# Altium PCB верхняя плата версия 2.PcbDoc (part 2 of 2)
Units mm, origin at the board's own origin, x right, y up, seen from the top; angles counter-clockwise.
Board outline 45 x 53 mm, 4 copper layers (Top Layer 1, Top Layer, Bottom Layer, Bottom Layer 1), stack 0.603 mm thick; 105 components, 130 nets, 774 pads, 328 vias.
Unrouted connection lines stored in the file: 15.
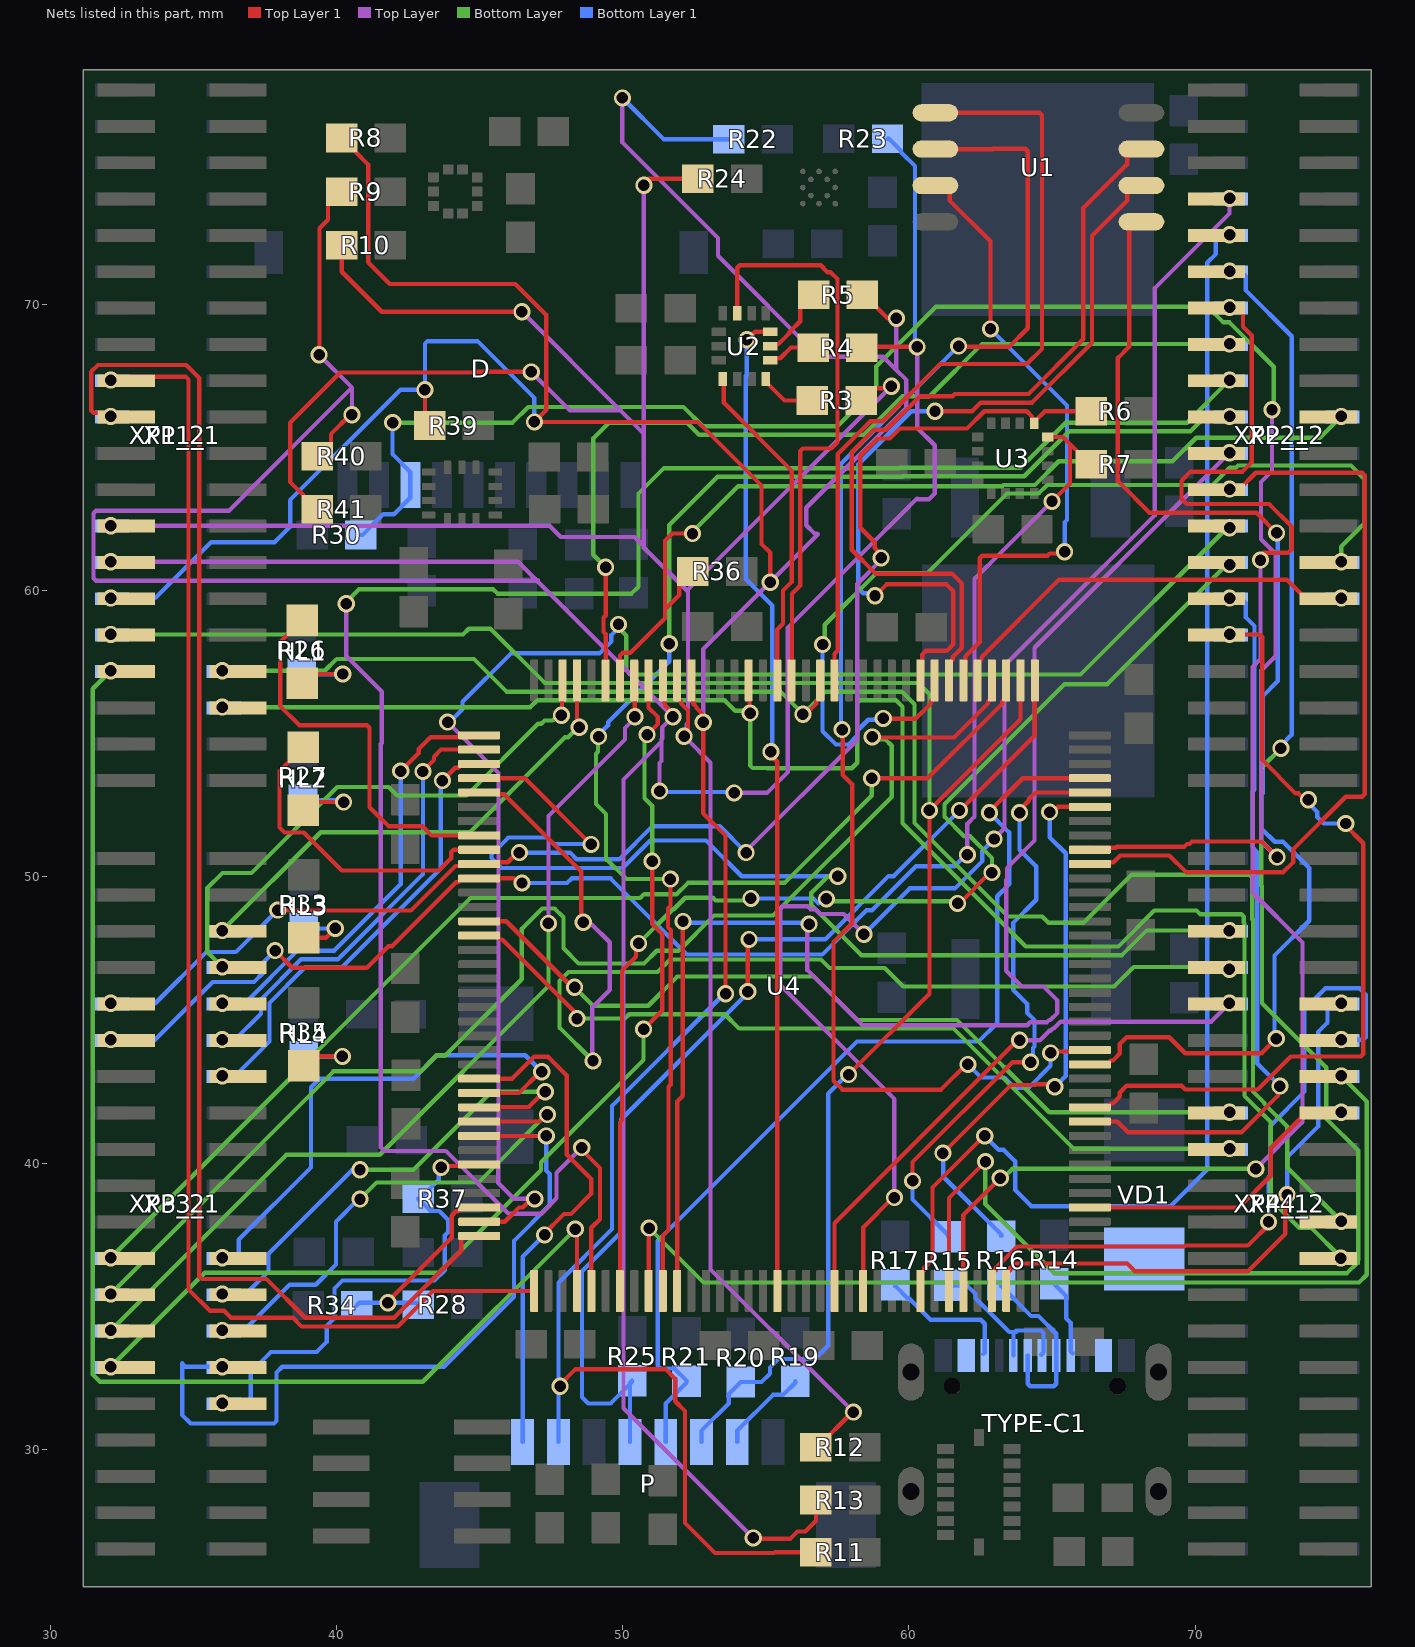
[diagram p4: the nets of this part, all layers, seen from the top]

## Via types
v1: diameter 0.6, hole 0.4, Top Layer 1 to Bottom Layer 1, 328 vias

## Nets (pads, with @x,y where several pads share a name; then routed paths per layer and width w, separated by ;. In a path a pad name is that pad's centre, name@x,y a point inside that pad or via, vN(x,y) a via of type N, cw(c..) or ccw(c..) an arc to the next point about the centre after c; other vN are vias at no path point) (continued)
NetD_8: D.8 R30.2 U4.100 | length 64.4
  Top Layer 1 w0.15: U4.100@66.32,50.95 66.385,51.015 67.223,51.015 67.258,51.05 69.617,51.05 69.717,51.15 69.802,51.15 69.889,51.238 72.321,51.238 v1(72.866,50.693)
  Top Layer w0.15: v1(72.688,66.327) 72.688,64.188 72.3,63.8 72.3,61.802 72.81,61.292 72.81,57.711 72.313,57.214 72.313,51.246 72.833,50.725 v1@72.85,50.725
  Bottom Layer w0.15: v1(41.963,65.877) 46.144,65.877 46.693,66.425 52.117,66.425 52.792,65.75 57.499,65.75 58.86,67.111 58.86,67.842 60.943,69.925 70.442,69.925 70.987,69.38 71.202,69.38 72.75,67.832 72.75,66.475 v1@72.625,66.35
  Bottom Layer 1 w0.15: R30.2@40.85,61.95 40.9,61.95 41.625,62.675 42,62.675 42.575,63.25 D.8@42.575,63.7 42.575,64.15 41.95,64.775 v1@41.95,65.925
NetHL1_1: HL1.1 R26.1 | length 2.9
  Top Layer 1 w0.15: HL1.1@38.8,56.775 39.118,57.093 v1(40.216,57.093)
  Bottom Layer 1 w0.15: R26.1@38.775,57.075 v1@40.15,57.075
NetHL1_2: HL1.2 U4.8 | length 13.8
  Top Layer 1 w0.15: HL1.2@38.8,58.975 38.025,58.2 38.025,55.975 38.7,55.3 41.062,55.3 41.15,55.212 41.15,52.438 41.813,51.775 42.993,51.775 43.318,51.45 U4.8@44.98,51.45
NetHL2_1: HL2.1 R27.1 | length 2.9
  Top Layer 1 w0.15: HL2.1@38.825,52.325 39.118,52.618 v1(40.241,52.618)
  Bottom Layer 1 w0.15: R27.1@38.825,52.675 40.1,52.675 v1@40.175,52.6
NetHL2_2: HL2.2 U4.9 | length 11.2
  Top Layer 1 w0.15: HL2.2@38.825,54.525 38,53.7 38,51.732 38.182,51.55 38.85,51.55 40.175,50.225 43.57,50.225 44,50.655 44,50.862 44.088,50.95 U4.9@44.98,50.95
NetHL3_1: HL3.1 R33.1 | length 2.3
  Top Layer 1 w0.15: HL3.1@38.85,47.875 39.625,47.875 v1(39.95,48.2)
  Bottom Layer 1 w0.15: R33.1@38.85,48.2 v1(39.95,48.2)
NetHL4_1: HL4.1 R35.1 | length 2.8
  Top Layer 1 w0.15: HL4.1@38.85,43.4 39.18,43.73 v1(40.203,43.73)
  Bottom Layer 1 w0.15: R35.1@38.85,43.725 40.125,43.725 v1@40.15,43.7
NetP_2: P.2 R19.1 | length 3.2
  Bottom Layer 1 w0.15: P.2@54,30.25 54,30.65 55.25,31.9 55.6,31.9 56.025,32.325 R19.1@56.025,32.375
NetP_3: P.3 R20.1 U4.110 XP1_1.31 XP1_2.31 | length 66.1
  Top Layer 1 w0.15: v1(57.891,43.093) 60.716,45.918 v1(60.716,52.325) ; v1@60.725,52.325 60.725,52.334 63.9,55.509 U4.110@63.9,56.87
  Bottom Layer w0.15: v1(32.105,58.475) 38.659,58.475 ; 38.66,58.475 44.417,58.475 44.617,58.675 45.376,58.675 47.276,56.775 60.325,56.775 60.716,56.384 v1(60.716,52.325)
  Bottom Layer 1 w0.15: P.3@52.75,30.25 52.75,30.65 53.7,31.6 53.7,31.925 R20.1@54.125,32.35 54.85,32.35 55.141,32.641 55.141,32.859 55.432,33.15 56.708,33.15 57.175,33.618 57.175,42.425 v1@57.825,43.075
NetP_4: P.4 R21.1 U4.105 | length 34.9
  Top Layer 1 w0.15: v1@62.75,52.225 63.975,53.45 U4.105@66.32,53.45
  Bottom Layer 1 w0.15: P.4@51.5,30.25 51.5,31.6 52.225,32.325 R21.1@52.225,32.375 52.225,32.4 51.8,32.825 51.313,32.825 51.225,32.913 51.225,37.29 58.185,44.25 62.436,44.25 63.086,44.9 63.086,49.325 63.501,49.74 63.501,51.557 v1(62.816,52.243)
NetP_5: P.5 R25.1 U4.109 | length 37.6
  Top Layer 1 w0.15: v1@54.35,47.8 54.366,47.784 v1(54.366,45.993) ; v1(61.766,52.325) 61.775,52.325 64.4,54.95 U4.109@64.4,56.87
  Bottom Layer 1 w0.15: P.5@50.25,30.25 50.25,32.325 R25.1@50.325,32.4 50.325,32.35 49.575,31.6 48.795,31.6 48.575,31.82 48.575,36.22 49.946,37.592 49.946,41.531 54.3,45.884 v1@54.3,45.975 ; v1(54.416,47.818) 57.076,47.818 59.286,50.028 59.469,50.028 v1(61.766,52.325)
NetP_7: P.7 R5.2 R8.1 R11.1 R22.1 R39.1 U4.133 XP1_1.29 XP1_2.29 | length 132.8
  Top Layer 1 w0.15: R8.1@40.175,75.825 40.225,75.825 40.65,75.4 40.65,75.35 41.1,74.9 41.1,71.482 41.857,70.725 46.243,70.725 47.325,69.642 47.325,66.315 46.95,65.94 46.95,65.9 52.625,65.9 54.85,63.675 54.85,61.633 55.15,61.333 v1(55.15,60.3) ; v1(43.085,67.025) 43.085,65.99 R39.1@43.25,65.825 ; v1@47.75,32.2 48.35,32.8 51.492,32.8 51.834,32.459 51.834,31.678 52.175,31.337 52.175,27.425 53.225,26.375 55.296,26.375 55.321,26.4 R11.1@56.75,26.4 ; U4.133@52.4,56.87 52.465,56.805 52.465,56.052 52.575,55.942 52.575,55.902 52.814,55.663 v1@52.814,55.408 ; v1(52.809,55.408) 52.814,55.403 52.814,52.222 53.591,51.446 v1(53.591,45.918) ; R5.2@58.375,70.35 58.425,70.35 59.25,69.525
  Top Layer w0.15: v1(49.985,77.225) 49.985,75.667 53.325,72.327 53.325,71.708 56.858,68.175 59.102,68.175 59.551,67.726 ; v1(52.809,55.408) 52.814,55.413 52.814,57.967 55.147,60.3 v1(55.15,60.3) ; v1@55.148,60.302 56.823,61.977 ; 56.8,62 56.7,62 56.41,62.29 56.41,62.9 59.91,66.4 59.91,67.367 59.551,67.726 ; v1(59.562,69.523) v1(59.562,69.523) 59.56,67.735 59.551,67.726
  Bottom Layer 1 w0.15: v1(32.105,59.745) 33.661,59.745 35.617,61.7 37.837,61.7 38.375,62.238 38.375,63.168 42.232,67.025 v1@42.96,67.025 ; v1(43.085,67.025) 43.085,68.637 43.173,68.725 44.925,68.725 46.91,66.74 v1(46.91,65.9) ; P.7@47.75,30.25 47.75,35.82 49.625,37.695 49.625,42 v1@53.525,45.9 ; v1@50,77.21 51.435,75.775 R22.1@53.7,75.775
  other v1: 47.81,32.2
NetP_8: P.8 U4.25 | length 18
  Top Layer 1 w0.15: U4.25@44.98,42.95 46.128,42.95 46.895,43.718 47.383,43.718 48.041,43.06 48.041,40.302 48.9,39.442 48.9,38.933 48.185,38.218 47.943,38.218 v1@47.2,37.475
  Bottom Layer 1 w0.15: P.8@46.5,30.25 46.5,36.727 v1(47.266,37.493)
NetR3_1: R3.1 U2.1 | length 2
  Top Layer 1 w0.15: U2.1@55,67.4 55,67.3 55.65,66.65 R3.1@56.625,66.65
NetR3_2: R3.2 R10.1 R12.2 R24.2 R41.1 U4.134 XP1_1.25 XP1_2.25 | length 115.7
  Top Layer 1 w0.15: R41.1@39.325,62.85 39.275,62.85 38.85,63.275 38.85,63.325 38.375,63.8 38.375,65.875 40.125,67.625 44.867,67.625 44.892,67.65 v1(46.8,67.65) ; R10.1@40.175,72.075 40.175,71.15 41.575,69.75 v1(46.475,69.75) ; v1@50.9,74.4 R24.2@52.625,74.4 ; U4.134@51.9,56.87 51.9,56.275 52.035,56.14 52.035,56.057 52.275,55.817 52.275,55.1 v1@52.075,54.9 ; R12.2@56.75,30.075 56.8,30.075 58,31.275 v1@58,31.3 ; R3.2@58.325,66.65 58.75,67.075 59.25,67.075 v1@59.325,67.15
  Top Layer w0.15: v1(32.105,62.275) 47.441,62.275 47.834,61.882 50.418,61.882 50.675,61.625 ; v1(46.475,69.75) 49.925,66.3 ; v1(46.8,67.65) 48.15,66.3 49.925,66.3 ; 50.725,61.65 50.725,65.5 49.925,66.3 ; v1(50.735,74.175) 50.735,65.5 50.735,61.65 50.735,61.515 52.25,60 ; v1@52.125,54.85 52.208,54.85 53.066,53.993 53.066,36.283 57.284,32.065 57.295,32.065 v1(58.06,31.3) ; v1@52.175,54.925 52.227,54.977 52.227,55.334 52.275,55.383 52.275,60 ; 52.275,60.04 v1(59.385,67.15)
  other v1: 52.141,54.918
NetR4_1: R4.1 U2.14 | length 1.7
  Top Layer 1 w0.15: U2.14@55.15,68.05 55.225,68.125 55.5,68.125 55.875,68.5 R4.1@56.65,68.5
NetR4_2: R4.2 R9.1 R13.1 R23.1 R40.1 U4.135 XP1_1.27 XP1_2.27 | length 130.8
  Top Layer 1 w0.15: R40.1@39.325,64.7 39.375,64.7 39.8,65.125 39.8,65.475 v1@40.475,66.15 ; v1@39.425,68.15 39.4,68.175 39.4,72.668 39.7,72.969 39.7,73.525 40.125,73.95 R9.1@40.175,73.95 ; U4.135@51.4,56.87 51.465,56.805 51.465,56.007 51.75,55.722 v1(51.75,55.6) ; v1@54.5,26.875 55.857,26.875 56.107,27.125 56.375,27.125 56.75,27.5 R13.1@56.75,28.225 ; R4.2@58.35,68.5 58.375,68.525 v1@60.225,68.525
  Top Layer w0.15: v1(32.105,61.015) 46.335,61.015 47,60.35 ; v1(39.385,68.25) 40.535,67.1 ; v1@40.575,66.2 40.535,66.24 40.535,67.1 ; 47.025,60.375 47,60.35 ; v1(51.285,53) 51.285,53.984 51.35,54.049 51.35,54.733 ; 51.35,54.825 51.35,54.733 ; 51.375,54.825 51.375,55.225 v1@51.725,55.575 ; v1@51.725,55.625 47,60.35 ; v1(53.889,52.937) 55.037,52.937 55.768,53.668 55.768,58.712 60.278,63.222 ; v1(54.56,26.9) 50.025,31.435 50.025,53.408 51.35,54.733 ; v1(60.285,68.525) 60.285,65.7 60.9,65.085 60.9,63.4 60.7,63.2 60.3,63.2 ; 40.535,67.1 36.235,62.8 31.588,62.8 31.5,62.712 31.5,60.438 31.588,60.35 47,60.35
  Bottom Layer 1 w0.15: v1@51.225,53 51.256,52.969 53.858,52.969 v1(53.889,52.937) ; R23.1@59.25,75.8 59.3,75.8 59.725,75.375 59.725,75.325 60.21,74.84 60.21,68.64 v1@60.275,68.575
  other v1: 40.535,66.15
NetR5_1: R5.1 U2.13 | length 2.6
  Top Layer 1 w0.15: U2.13@55.15,68.55 55.225,68.625 55.443,68.625 55.822,69.003 55.822,69.04 56.2,69.418 56.2,69.925 56.625,70.35 R5.1@56.675,70.35
NetR6_1: R6.1 U3.16 U4.10 XP3_1.9 XP3_2.9 | length 50.8
  Top Layer 1 w0.15: v1@37.875,48.825 42.594,48.825 44.154,50.385 U4.10@44.915,50.385 ; U4.10@44.95,50.475 44.99,50.515 45.978,50.515 46.313,50.85 v1(46.385,50.85) ; v1(59.025,61.15) 59.025,61.272 58.802,61.495 58.802,61.698 58.3,62.2 58.3,64.718 58.907,65.325 59.331,65.325 59.681,65.675 62.032,65.675 62.632,66.275 64.118,66.275 64.3,66.093 64.3,65.925 U3.16@64.375,65.85 64.375,65.9 64.75,66.275 R6.1@66.375,66.275
  Top Layer w0.15: v1@54.25,50.85 58.191,54.791 58.191,60.239 59.025,61.073 v1(59.025,61.15)
  Bottom Layer 1 w0.15: v1(32.105,45.585) 33.661,45.585 35.456,47.38 36.478,47.38 v1(37.941,48.843) ; v1@46.325,50.85 48.154,50.85 48.39,50.613 49.875,50.613 51.037,51.775 53.385,51.775 v1(54.31,50.85)
NetR7_1: R7.1 U3.1 U4.11 XP3_1.11 XP3_2.11 | length 53.4
  Top Layer 1 w0.15: v1(37.85,47.425) 38.45,46.825 41.057,46.825 41.807,47.575 41.932,47.575 44.172,49.815 44.25,49.815 44.385,49.95 U4.11@44.98,49.95 ; U4.11@45.012,49.963 45.025,49.95 46.193,49.95 46.355,49.788 v1(46.476,49.788) ; U3.1@64.85,65.375 65.375,65.375 65.625,65.125 ; v1(65,63.125) 65.625,63.75 65.625,65.125 ; R7.1@66.375,64.425 66.325,64.425 65.625,65.125
  Top Layer w0.15: v1(62.041,50.776) 62.041,51.858 62.291,52.108 62.291,60.416 v1(65,63.125)
  Bottom Layer 1 w0.15: v1(32.105,44.315) 33.661,44.315 35.672,46.325 37.109,46.325 37.436,46.652 37.436,47.011 v1(37.85,47.425) ; v1(46.476,49.788) 48.051,49.788 48.213,49.95 49.575,49.95 52.233,47.293 56.975,47.293 58.516,48.834 58.708,48.834 60.249,50.375 61.593,50.375 61.994,50.776 v1(62.041,50.776)
NetR14_2: R14.2 TYPE-C1.A5 | length 2.7
  Bottom Layer 1 w0.15: R14.2@65.075,35.775 65.5,35.35 65.5,34.572 65.65,34.422 65.65,33.425 TYPE-C1.A5@65.725,33.35
NetR15_1: R15.1 TYPE-C1.A6 TYPE-C1.B6 | length 5.8
  Bottom Layer 1 w0.15: R15.1@61.375,35.725 62.025,35.725 62.328,35.422 62.328,35.278 63.507,34.1 63.688,34.1 ; TYPE-C1.B6@63.65,33.275 63.65,34.062 63.688,34.1 ; 63.75,34.1 63.688,34.1 ; 63.75,34.15 64.612,34.15 64.7,34.062 64.7,33.375 TYPE-C1.A6@64.625,33.3
NetR15_2: R15.2 U4.104 | length 21.2
  Top Layer 1 w0.15: v1(60.125,39.375) 60.125,40.032 63.618,43.525 v1(64.25,43.525) ; v1(63.866,52.243) 63.866,52.34 64.188,52.662 64.188,52.713 64.425,52.95 U4.104@66.32,52.95
  Bottom Layer 1 w0.15: v1(60.125,39.375) 60.125,38.725 61.375,37.475 R15.2@61.375,37.425 ; v1@63.825,52.25 63.866,52.209 63.866,50.952 64.449,50.369 64.449,49.203 63.641,48.395 63.641,46.055 64.136,45.56 64.136,45.25 64.391,44.996 64.391,44.075 64.336,44.02 64.336,43.611 v1(64.25,43.525)
NetR16_1: R16.1 TYPE-C1.A7 TYPE-C1.B7 | length 6.4
  Bottom Layer 1 w0.15: R16.1@63.225,35.75 63.225,35.7 64.269,34.656 64.531,34.656 65.15,34.036 TYPE-C1.B7@65.15,33.35 ; TYPE-C1.A7@64.15,33.275 64.15,32.288 64.238,32.2 65.062,32.2 65.15,32.288 TYPE-C1.B7@65.15,33.275
NetR16_2: R16.2 U4.103 | length 20.2
  Top Layer 1 w0.15: v1(61.185,40.35) 63.566,42.731 64.418,42.731 64.437,42.75 65.01,42.75 v1(65.095,42.665) ; v1(64.916,52.268) 65.038,52.268 65.22,52.45 U4.103@66.32,52.45
  Bottom Layer 1 w0.15: v1@61.2,40.35 61.2,39.525 63.225,37.5 R16.2@63.225,37.45 ; v1(64.916,52.268) 64.916,51.387 65.477,50.826 65.477,43.047 65.1,42.67 v1@65.1,42.65
NetR17_1: R17.1 TYPE-C1.B5 | length 4.8
  Bottom Layer 1 w0.15: R17.1@59.525,35.75 59.525,35.7 59.95,35.275 60,35.275 60.75,34.525 62.512,34.525 62.65,34.387 62.65,33.375 TYPE-C1.B5@62.6,33.325
NetR28_1: R28.1 R34.2 U4.34 | length 7.3
  Top Layer 1 w0.15: v1@41.725,35.1 44.02,37.395 44.02,38.163 44.172,38.315 44.25,38.315 44.385,38.45 U4.34@44.98,38.45
  Bottom Layer 1 w0.15: R34.2@40.7,35.025 40.793,35.118 v1(41.791,35.118) 42.782,35.118 R28.1@42.85,35.05
NetR36_1: R36.1 U4.138 XP2_1.20 XP2_2.20 | length 32.9
  Top Layer 1 w0.15: U4.138@49.9,56.87 49.9,57.742 49.988,57.83 50.26,57.83 51.471,59.041 51.471,59.354 ; v1@52.375,62 51.725,62 51.471,61.746 51.471,59.354 ; R36.1@52.45,60.675 52.4,60.675 51.975,60.25 51.975,59.858 51.471,59.354
  Bottom Layer w0.15: v1@52.375,62 54.029,63.654 63.257,63.654 63.302,63.7 64.408,63.7 65.233,64.525 69.214,64.525 70.038,65.35 74.36,65.35 v1(75.105,66.095)
  other v1: 52.435,62
NetR37_1: R37.1 U4.31 XP3_1.32 XP3_2.32 | length 17.3
  Top Layer 1 w0.15: v1(43.65,39.849) 43.7,39.9 44.93,39.9 U4.31@44.98,39.95
  Bottom Layer 1 w0.15: XP3_2.32@36,31.7 36.1,31.6 36.912,31.6 37,31.688 37,32.7 37.7,33.4 39.3,33.4 39.65,33.75 39.65,34.307 39.925,34.582 39.925,35.618 40.203,35.897 43.422,35.897 43.775,36.25 43.775,37.468 43.893,37.586 43.893,38.017 43.586,38.325 43.275,38.325 R37.1@42.85,38.75 42.9,38.75 43.564,39.414 43.564,39.763 v1(43.65,39.849)
  other v1: 36.005,31.615
NetTYPE-C1_2: TYPE-C1.2 TYPE-C1.15 VD1.1
NetU1_1: U1.1 U4.123 | length 28.5
  Top Layer 1 w0.15: U4.123@57.4,56.87 57.4,57.799 57.507,57.906 57.507,64.774 58.658,65.925 59.083,65.925 61.083,67.925 64.12,67.925 64.65,68.455 64.65,76.617 64.562,76.705 U1.1@60.925,76.705
NetU1_2: U1.2 U4.86 | length 50.7
  Top Layer 1 w0.15: v1(57.666,55.15) 57.685,55.131 57.685,53.566 58.016,53.235 58.016,48.38 57.366,47.73 57.366,42.875 57.673,42.568 61.118,42.568 v1@62,43.45 ; U1.2@60.925,75.435 62.91,75.435 62.925,75.45 64.062,75.45 64.15,75.362 64.15,69.175 63.5,68.525 v1@61.675,68.525 ; v1(64.95,43.85) 65,43.9 66.14,43.9 66.255,44.015 U4.86@66.32,43.95
  Bottom Layer 1 w0.15: v1(57.666,55.15) 57.625,55.191 57.625,64.44 v1(61.735,68.55) ; v1@62.05,43.5 62.05,43.46 v1(62.06,43.45) 62.516,42.994 63.331,42.994 63.7,42.625 64.175,42.625 64.95,43.4 v1(64.95,43.85)
NetU1_3: U1.3 U4.114 | length 22.5
  Top Layer 1 w0.15: U1.3@60.925,74.165 61.215,74.165 61.422,73.957 61.422,73.64 62.85,72.212 v1(62.85,69.15) ; U4.114@61.9,56.87 61.965,56.935 61.965,57.698 62.475,58.208 62.475,61.137 62.563,61.225 64.841,61.225 64.916,61.3 65.378,61.3 v1(65.441,61.363)
  Bottom Layer 1 w0.15: v1(62.85,69.15) 65.525,66.475 65.525,62.476 65.441,62.392 v1(65.441,61.363)
NetU1_5: U1.5 U4.85 | length 42.7
  Top Layer 1 w0.15: U4.85@66.275,43.5 66.965,43.5 67.05,43.585 67.128,43.585 67.367,43.825 67.367,44.16 67.607,44.4 69.097,44.4 69.657,43.84 72.325,43.84 v1(72.835,44.35) ; U1.5@68.125,72.895 67.908,72.895 67.7,72.687 67.7,68.54 67.3,68.14 67.3,63.832 68.402,62.73 72.145,62.73 v1(72.85,62.025)
  Bottom Layer 1 w0.15: v1@72.775,44.35 72.775,47.255 73.99,48.469 73.99,50.311 73.073,51.228 72.78,51.228 72.313,51.695 72.313,52.865 72.375,52.928 72.375,56.326 72.885,56.836 72.885,61.99 v1(72.85,62.025)
NetU1_6: U1.6 U4.117 | length 28.4
  Top Layer 1 w0.15: v1(58.813,59.825) 59.213,60.225 61.312,60.225 61.55,59.987 61.55,58.132 61.318,57.9 60.588,57.9 60.465,57.777 60.465,57.165 U4.117@60.4,57.1 ; U4.117@60.335,57.1 60.335,56.935 U4.117@60.4,56.87 ; v1(60.91,66.275) 62.208,66.275 62.508,66.575 64.299,66.575 66.394,68.671 66.394,72.407 67.628,73.64 67.628,73.957 67.835,74.165 U1.6@68.125,74.165
  Bottom Layer 1 w0.15: v1(58.813,59.825) 58.726,59.911 58.4,59.911 58.225,60.086 58.225,64.418 60.082,66.275 v1(60.91,66.275)
NetU1_7: U1.7 U4.115 | length 28.7
  Top Layer 1 w0.15: U4.115@61.4,56.87 61.4,57.465 61.535,57.6 61.535,57.693 61.85,58.008 61.85,60.25 61.5,60.6 58.833,60.6 58,61.433 58,64.842 58.783,65.625 59.207,65.625 60.382,66.8 61.525,66.8 61.6,66.875 64.174,66.875 66.094,68.795 66.094,73.377 67.628,74.91 67.628,75.227 67.835,75.435 U1.7@68.125,75.435
NetU2_4: U2.4 U4.127 | length 11.7
  Top Layer 1 w0.15: U2.4@53.5,67.4 53.525,67.375 53.525,66.575 55.9,64.2 55.9,60.308 55.6,60.008 55.6,58.849 55.4,58.649 U4.127@55.4,56.87
NetU2_9: U2.9 U4.126 | length 20.6
  Top Layer 1 w0.15: U2.9@54,69.7 54,71.287 54.088,71.375 56.917,71.375 57.158,71.134 57.259,71.134 57.5,70.893 57.5,65.191 57.284,64.975 56.288,64.975 56.2,64.887 56.2,60.183 55.916,59.899 55.916,58.74 55.9,58.724 U4.126@55.9,56.87
NetU2_12: U2.12 U4.54 | length 34.6
  Top Layer 1 w0.15: v1@54.375,68.8 54.625,69.05 U2.12@55.15,69.05 ; v1(55.175,54.375) 55.175,54.253 55.4,54.028 U4.54@55.4,35.53
  Bottom Layer 1 w0.15: v1@54.335,68.74 54.335,67.543 54.299,67.507 54.299,60.409 55.225,59.483 55.225,54.425 v1(55.175,54.375)
  other v1: 54.335,68.775
NetU4_1: U4.1 XP3_1.10 XP3_2.10 | length 15.3
  Top Layer 1 w0.15: v1(42.241,53.7) 42.869,54.328 42.869,54.469 43.285,54.885 44.167,54.885 ; 44.167,54.885 44.915,54.885 U4.1@44.98,54.95
  Bottom Layer 1 w0.15: v1(36.005,45.585) 36.793,45.585 38.633,47.425 39.917,47.425 42.241,49.748 v1(42.241,53.7)
NetU4_2: U4.2 XP3_1.12 XP3_2.12 | length 15.6
  Top Layer 1 w0.15: v1(43.015,53.685) 43.015,53.706 43.401,54.092 43.401,54.201 43.65,54.45 U4.2@44.98,54.45
  Bottom Layer 1 w0.15: v1(36.005,44.315) 36.45,44.315 37.354,45.219 37.354,45.721 38.758,47.125 40.042,47.125 43.016,50.099 v1(43.015,53.685)
NetU4_3: U4.3 XP3_1.14 XP3_2.14 | length 16
  Top Layer 1 w0.15: v1(43.694,53.367) 44.142,53.815 44.25,53.815 44.385,53.95 U4.3@44.98,53.95
  Bottom Layer 1 w0.15: v1(36.005,43.045) 36.45,43.045 37.654,44.249 37.654,45.597 38.882,46.825 40.166,46.825 43.641,50.3 43.641,53.314 v1(43.694,53.367)
NetU4_4: U4.4 XP4_1.5 XP4_2.5 | length 39.1
  Top Layer 1 w0.15: U4.4@44.98,53.45 46.579,53.45 v1(48.891,51.138)
  Bottom Layer w0.15: v1@57.35,50 57.143,50 56.59,49.447 56.59,49.013 58.335,47.268 67.442,47.268 68.299,48.125 v1(71.2,48.125)
  Bottom Layer 1 w0.15: v1@48.9,51.125 48.875,51.125 48.85,51.1 48.8,51.15 47.575,51.15 47.35,51.375 46,51.375 45.412,50.787 45.412,50.663 45.762,50.313 50,50.313 50.961,51.275 52.906,51.275 54.156,50.025 v1(57.51,50.025)
NetU4_5: U4.5 XP4_1.7 XP4_2.7 | length 39.8
  Top Layer 1 w0.15: U4.5@44.98,52.95 45.575,52.95 45.64,52.885 45.854,52.885 48.55,50.189 v1@48.55,48.418
  Top Layer w0.15: v1@48.625,48.425 48.719,48.331 48.927,48.331 49.541,47.717 49.541,46.047 48.935,45.442 48.935,43.597 v1(48.959,43.573)
  Bottom Layer w0.15: v1(48.959,43.573) 48.952,43.573 47.791,44.734 47.791,46.36 48.106,46.675 51.216,46.675 51.658,47.118 56.924,47.118 57.224,46.818 59.151,46.818 59.801,46.168 67.17,46.168 67.857,46.855 71.12,46.855 v1(71.2,46.775)
  other v1: 48.616,48.418
NetU4_14: U4.14 XP4_1.15 XP4_2.15 | length 29.8
  Top Layer 1 w0.15: U4.14@44.98,48.45 45.925,48.45 v1@48.25,46.125
  Bottom Layer w0.15: v1@48.332,46.143 48.332,46.126 48.958,45.5 50.889,45.5 51.907,46.518 56.675,46.518 58.193,45 61.677,45 64.902,41.775 v1(71.205,41.775)
  other v1: 48.316,46.143
NetU4_15: U4.15 XP4_1.17 XP4_2.17 | length 29.2
  Top Layer 1 w0.15: U4.15@44.98,47.95 45.575,47.95 45.71,47.815 45.788,47.815 v1@48.314,45.289
  Bottom Layer w0.15: v1(48.4,45.05) 50.073,45.05 50.223,45.2 53.566,45.2 54.066,44.7 61.552,44.7 65.748,40.505 v1(71.205,40.505)
NetU4_26: U4.26 XP3_1.24 XP3_2.24 | length 18.7
  Top Layer 1 w0.15: U4.26@44.98,42.45 46.375,42.45 v1@47.1,43.175
  Bottom Layer 1 w0.15: v1(36.005,36.695) 36.45,36.695 36.575,36.82 36.575,37.322 39.1,39.847 39.1,42.65 39.4,42.95 42.681,42.95 43.498,43.768 46.591,43.768 v1(47.166,43.193)
NetU4_27: U4.27 XP3_1.26 XP3_2.26 | length 17
  Top Layer 1 w0.15: U4.27@44.98,41.95 46.7,41.95 v1@47.225,42.475
  Bottom Layer w0.15: v1(40.816,39.768) 42.691,39.768 45.416,42.493 47.243,42.493 v1@47.275,42.525
  Bottom Layer 1 w0.15: v1(36.005,35.425) 36.825,35.425 37.616,36.216 37.616,36.834 40.532,39.75 v1@40.75,39.75
  other v1: 47.291,42.493
NetU4_28: U4.28 XP3_1.28 XP3_2.28 | length 17.7
  Top Layer 1 w0.15: U4.28@44.98,41.45 47.075,41.45 v1@47.3,41.675
  Bottom Layer w0.15: v1(40.816,38.743) 41.398,39.324 44.957,39.324 47.308,41.675 v1@47.375,41.675
  Bottom Layer 1 w0.15: v1(36.005,34.155) 36.13,34.28 36.887,34.28 38.357,35.75 39.268,35.75 39.975,36.457 39.975,37.95 v1@40.75,38.725
  other v1: 47.366,41.693
NetU4_29: U4.29 XP3_1.30 XP3_2.30 | length 26.3
  Top Layer 1 w0.15: U4.29@44.98,40.95 v1(47.325,40.95)
  Bottom Layer 1 w0.15: v1(36.005,32.885) 34.715,32.885 34.6,33 34.6,31.2 34.9,30.9 37.812,30.9 37.9,30.988 37.9,32.685 38.1,32.885 43.753,32.885 46.2,35.332 46.2,37.283 47.45,38.533 47.45,39.618 47.325,39.743 v1(47.325,40.95)
NetU4_35: U4.35 XP2_1.25 XP2_2.25 | length 53.4
  Top Layer 1 w0.15: U4.35@44.98,37.95 45.875,37.95 46.376,38.451 46.504,38.451 46.803,38.75 v1(46.925,38.75)
  Top Layer w0.15: v1(43.875,55.41) 45.656,53.629 45.656,39.769 45.65,39.764 45.65,39.308 46.208,38.75 v1(46.925,38.75)
  Bottom Layer w0.15: v1(49.85,58.825) 49.85,58.703 50.125,58.428 50.125,57.213 50.263,57.075 65.995,57.075 71.125,62.205 v1(71.205,62.205)
  Bottom Layer 1 w0.15: v1(43.875,55.41) 43.949,55.41 44.4,55.86 44.4,56.119 46.093,57.813 49.188,57.813 49.601,58.226 49.601,58.454 49.85,58.703 v1(49.85,58.825)
NetU4_36: U4.36 XP1_1.19 XP1_2.19 | length 49.4
  Top Layer 1 w0.15: v1(32.105,66.095) 31.979,66.22 31.505,66.22 31.425,66.3 31.425,67.658 31.656,67.89 34.747,67.89 35.2,67.436 35.2,36.038 35.288,35.95 37.544,35.95 38.901,34.593 42.008,34.593 44.355,36.939 44.355,37.385 44.42,37.45 U4.36@44.98,37.45
NetU4_37: U4.37 XP1_1.17 XP1_2.17 | length 47.7
  Top Layer 1 w0.15: v1(32.105,67.365) 32.215,67.475 34.737,67.475 34.825,67.387 34.825,35.582 35.57,34.837 36.065,34.837 36.309,34.593 38.476,34.593 38.776,34.293 42.132,34.293 43.37,35.53 U4.37@46.9,35.53
NetU4_40: U4.40 XP1_1.33 XP1_2.33 | length 46.1
  Top Layer 1 w0.15: U4.40@48.4,35.53 v1@48.4,37.6
  Bottom Layer w0.15: v1(32.105,57.205) 31.475,56.575 31.475,32.613 31.728,32.36 43.008,32.36 48.273,37.625 v1@48.375,37.625
  other v1: 48.341,37.693
NetU4_41: U4.41 XP2_1.17 XP2_2.17 | length 70.6
  Top Layer 1 w0.15: v1@48.5,40.525 49.2,39.825 49.2,38.04 48.9,37.74 U4.41@48.9,35.53
  Top Layer w0.15: v1(40.335,59.55) 40.335,57.716 41.575,56.476 41.575,54.678 41.544,54.648 41.544,40.543 41.663,40.425 43.817,40.425 46.017,38.225 47.142,38.225 47.686,38.769 47.686,39.663 48.525,40.502 v1@48.525,40.525
  Bottom Layer w0.15: v1@40.275,59.55 40.78,60.055 45.466,60.055 45.621,59.9 50.307,59.9 50.55,60.143 50.55,63.4 51.436,64.286 59.657,64.286 59.671,64.3 63.902,64.3 65.477,65.875 69.715,65.875 v1(71.205,67.365)
  other v1: 48.566,40.543
NetU4_43: U4.43 XP2_1.27 XP2_2.27 | length 42.8
  Top Layer 1 w0.15: U4.43@49.9,35.53 49.9,41.42 49.975,41.495 49.975,46.725 50.464,47.214 50.464,47.589 v1(50.55,47.675) ; v1(61.7,49.075) 61.763,49.075 62.838,50.15 v1(62.9,50.15)
  Bottom Layer w0.15: v1(50.55,47.675) 51.747,48.872 51.78,48.872 52.182,49.275 53.142,49.275 53.242,49.175 54.4,49.175 v1(54.475,49.25) ; v1(57.115,49.23) 57.192,49.152 61.623,49.152 v1(61.7,49.075) ; v1(62.9,50.15) 62.9,50.659 62.139,51.42 61.928,51.42 61.241,52.108 61.241,52.542 65.434,56.736 66.926,56.736 71.105,60.915 v1(71.205,60.915)
  Bottom Layer 1 w0.15: v1(54.475,49.25) 56.663,49.25 56.838,49.075 56.993,49.23 v1(57.115,49.23)
NetU4_45: U4.45 XP4_1.14 XP4_2.14 | length 35.4
  Top Layer 1 w0.15: U4.45@50.9,35.53 50.911,35.541 50.911,37.718 v1(50.921,37.729)
  Bottom Layer w0.15: v1@50.975,37.625 51.025,37.625 52.825,35.825 75.725,35.825 76,36.1 76,42.149 v1(75.105,43.045)
NetU4_46: U4.46 XP2_1.19 XP2_2.19 | length 51.2
  Top Layer 1 w0.15: U4.46@51.4,35.53 51.4,37.465 51.6,37.665 51.6,42.666 51.675,42.741 51.675,48.141 51.578,48.238 51.578,48.902 51.666,48.99 v1(51.666,49.925)
  Bottom Layer w0.15: v1(49.154,54.904) 49.135,54.885 49.135,54.379 49.06,54.304 49.06,52.55 49.416,52.194 49.416,50.6 ; 49.45,50.6 50.125,49.925 v1(51.666,49.925) ; v1(51.625,58.15) 51.625,62.3 53.311,63.986 59.782,63.986 59.795,64 64.027,64 65.602,65.575 69.839,65.575 70.359,66.095 v1(71.205,66.095)
  Bottom Layer 1 w0.15: v1(49.154,54.904) 49.154,54.965 49.494,55.305 49.494,55.412 50.711,56.628 50.728,56.628 51.625,57.525 51.625,58.075 51.65,58.1 51.625,58.125 v1(51.625,58.15)
NetU4_47: U4.47 XP2_1.21 XP2_2.21 | length 52.8
  Top Layer 1 w0.15: U4.47@51.9,35.53 51.9,42.155 52.1,42.355 52.1,48.441 v1(52.103,48.445)
  Top Layer w0.15: v1@56.45,48.35 56.45,46.743 58.375,44.818 64.133,44.818 64.241,44.925 64.825,44.925 64.9,45 64.936,45 65.186,45.25 65.186,45.685 64.704,46.168 63.948,46.168 63.399,46.717 63.399,49.906 63.425,49.933 63.425,50.307 64.391,51.273 64.391,58.011 v1(71.205,64.825)
  Bottom Layer 1 w0.15: v1(52.103,48.445) 52.151,48.397 56.463,48.397 v1(56.51,48.35)
NetU4_58: U4.58 XP4_1.9 XP4_2.9 | length 19.4
  Top Layer 1 w0.15: U4.58@57.4,35.53 57.4,37.9 63.793,44.293 v1(63.866,44.293)
  Top Layer w0.15: v1(63.866,44.293) 64.574,44.293 64.907,44.625 64.949,44.625 65.024,44.7 65.06,44.7 65.303,44.943 70.563,44.943 71.198,45.578 v1(71.198,45.591)
NetU4_60: U4.60 XP2_1.7 XP2_2.7 | length 50.6
  Top Layer 1 w0.15: U4.60@58.4,35.53 58.4,37.75 v1@59.425,38.775
  Top Layer w0.15: v1@58.375,48.05 57.72,48.705 56.898,48.705 56.727,48.875 56.558,48.875 56.458,48.975 55.588,48.975 55.5,48.887 55.5,46.226 59.491,42.235 v1(59.491,38.793) ; v1(62.976,51.326) 62.976,51.338 63.341,51.703 63.341,57.385 68.585,62.629 68.585,70.567 71.205,73.187 v1(71.205,73.715)
  Bottom Layer 1 w0.15: v1(58.425,48) 60.025,49.6 61.608,49.6 62.566,50.558 62.566,50.916 v1(62.976,51.326)
NetU4_64: U4.64 XP2_1.9 XP2_2.9 | length 49.4
  Top Layer 1 w0.15: U4.64@60.4,35.53 60.4,36.125 60.535,36.26 60.535,36.338 60.825,36.628 60.825,39.15 62.625,40.95 v1(62.65,40.95)
  Bottom Layer 1 w0.15: v1(62.65,40.95) 63.138,40.462 63.314,40.462 63.716,40.06 63.716,39.059 64.275,38.5 ; 64.275,38.493 69.143,38.493 70.425,39.775 70.425,71.468 70.725,71.768 70.725,72.27 70.9,72.445 v1(71.205,72.445)
NetU4_66: U4.66 XP2_1.11 XP2_2.11 | length 58.3
  Top Layer 1 w0.15: U4.66@61.4,35.53 61.4,38.775 v1(62.675,40.05)
  Bottom Layer w0.15: v1(62.675,40.05) 62.666,40.041 62.666,38.568 65.08,36.153 75.306,36.153 75.688,36.535 75.688,36.612 75.7,36.625 75.7,40.437 74.58,41.557 74.58,43.348 72.341,45.587 72.341,49.686 72.313,49.714 72.313,53.813 v1(73,54.5)
  Bottom Layer 1 w0.15: v1(71.205,71.175) 71.6,71.175 71.775,71 71.775,70.498 73.375,68.898 73.375,54.974 73,54.599 v1(73,54.5)
NetU4_67: U4.67 XP2_1.13 XP2_2.13 | length 51.9
  Top Layer 1 w0.15: U4.67@61.9,35.53 61.9,38.184 v1(63.191,39.475) ; v1(71.205,69.905) 71.5,69.905 71.675,69.73 71.675,69.228 71.975,68.928 71.975,64.482 71.658,64.165 69.842,64.165 69.525,63.848 69.525,63.212 69.707,63.03 72.588,63.03 73.375,62.242 73.375,61.45 73.25,61.325 72.388,61.325 72.3,61.237 v1@72.3,61.125
  Top Layer w0.15: v1(72.117,39.798) 73.75,41.431 73.75,47.707 72.013,49.444 72.013,57.338 72.285,57.611 v1(72.285,61.075)
  Bottom Layer w0.15: v1(63.191,39.475) 63.288,39.475 63.611,39.798 v1(72.117,39.798)
NetU4_69: U4.69 XP4_1.12 XP4_2.12 | length 24
  Top Layer 1 w0.15: U4.69@62.9,35.53 62.9,36.125 63.035,36.26 63.035,36.338 63.782,37.085 69.622,37.085 69.657,37.12 71.845,37.12 v1@72.625,37.9
  Bottom Layer 1 w0.15: v1(72.566,37.943) 72.566,39.504 72.642,39.58 72.642,41.317 73.825,42.5 73.825,45.378 74.556,46.11 75.744,46.11 75.975,45.878 75.975,44.403 75.887,44.315 v1(75.105,44.315)
NetU4_70: U4.70 XP4_1.10 XP4_2.10 | length 20.2
  Top Layer 1 w0.15: U4.70@63.4,35.53 63.4,36.125 63.535,36.26 63.535,36.338 63.687,36.49 67.63,36.49 67.9,36.22 71.843,36.22 73.15,37.527 v1@73.15,38.875
  Bottom Layer 1 w0.15: v1(73.216,38.893) 73.216,40.191 74.3,41.275 74.3,44.583 74.625,44.908 74.625,45.41 74.8,45.585 v1(75.105,45.585)
NetU4_75: U4.75 XP4_1.16 XP4_2.16 | length 10.7
  Top Layer 1 w0.15: U4.75@66.32,38.45 71.533,38.45 72.642,39.558 72.642,40.517 73.9,41.775 v1(75.105,41.775)
NetU4_81: U4.81 XP2_1.29 XP2_2.29 | length 25.6
  Top Layer 1 w0.15: U4.81@66.32,41.45 67.28,41.45 67.655,41.075 71.618,41.075 72.9,42.357 v1@72.9,42.675
  Bottom Layer 1 w0.15: v1(71.205,59.745) 71.6,59.745 71.775,59.57 71.775,59.068 72.075,58.768 72.075,53.052 72.013,52.989 72.013,51.021 72.175,50.858 72.175,43.483 v1(72.966,42.693)
NetU4_82: U4.82 XP2_1.31 XP2_2.31 | length 28.3
  Top Layer 1 w0.15: U4.82@66.32,41.95 66.915,41.95 67.05,42.085 67.128,42.085 67.367,42.325 67.367,42.46 67.607,42.7 69.527,42.7 69.657,42.57 72.188,42.57 73.343,43.725 75.787,43.725 75.875,43.813 75.875,51.175 v1@75.2,51.85 ; v1(71.205,58.475) 72.262,58.475 72.35,58.387 72.35,54.083 73.513,52.92 73.611,52.92 73.836,52.695 v1(73.958,52.695)
  Bottom Layer 1 w0.15: v1(73.958,52.695) 73.958,52.581 74.272,52.267 74.272,52.096 74.5,51.868 v1(75.266,51.868)
NetU4_99: U4.99 XP2_1.23 XP2_2.23 | length 27.5
  Top Layer 1 w0.15: U4.99@66.32,50.45 66.385,50.515 67.148,50.515 67.383,50.75 69.097,50.75 69.679,50.168 73.083,50.168 73.425,50.509 73.425,50.958 75.267,52.8 75.837,52.8 75.925,52.888 75.925,64.037 75.837,64.125 72.12,64.125 71.55,63.555 v1(71.205,63.555)
NetU4_111: U4.111 XP3_1.23 XP3_2.23 | length 40.4
  Top Layer 1 w0.15: v1(58.7,53.45) 60.653,53.45 63.265,56.062 63.265,56.14 63.4,56.275 U4.111@63.4,56.87
  Bottom Layer w0.15: v1(32.105,36.695) 44.673,49.263 50.609,49.263 50.746,49.4 51.883,49.4 52.276,49.793 55.651,49.793 58.7,52.841 v1(58.7,53.45)
NetU4_112: U4.112 XP3_1.25 XP3_2.25 | length 45.9
  Top Layer 1 w0.15: v1@58.716,54.875 61.578,54.875 62.765,56.062 62.765,56.14 62.9,56.275 U4.112@62.9,56.87
  Bottom Layer w0.15: v1(32.105,35.425) 39.885,43.205 42.936,43.205 43.498,43.768 43.808,43.768 46.467,46.426 46.467,48.184 47.183,48.9 47.617,48.9 47.925,48.592 47.925,47.505 48.455,46.975 50.741,46.975 51.183,47.418 51.958,47.418 53.191,48.65 55.251,48.65 59.4,52.799 59.4,54.586 59.18,54.806 58.894,54.806 v1@58.675,55.025
  other v1: 58.716,54.893
NetU4_113: U4.113 XP2_1.30 XP2_2.30 | length 14.8
  Top Layer 1 w0.15: U4.113@62.4,56.87 62.4,57.465 62.535,57.6 62.535,57.678 65.247,60.39 73.205,60.39 73.85,59.745 v1(75.105,59.745)
NetU4_116: U4.116 XP2_1.28 XP2_2.28 | length 33.9
  Top Layer 1 w0.15: v1(59.101,55.543) 59.119,55.525 60.228,55.525 60.765,56.062 60.765,56.14 60.9,56.275 U4.116@60.9,56.87
  Bottom Layer w0.15: v1(56.982,58.123) 57.056,58.197 57.056,58.811 58.87,60.625 60.652,60.625 63.427,63.4 64.533,63.4 64.833,63.7 70.608,63.7 71.207,64.3 71.422,64.3 71.502,64.38 75.447,64.38 75.93,63.896 75.93,62.367 75.105,61.542 v1(75.105,61.015)
  Bottom Layer 1 w0.15: v1(56.982,58.123) 56.982,55.091 57.448,54.625 57.883,54.625 58.191,54.933 58.191,55.11 58.576,55.495 59.045,55.495 v1@59.1,55.55
NetU4_124: U4.124 XP1_1.34 XP1_2.34 XP4_1.22 XP4_2.22 | length 58.5
  Top Layer 1 w0.15: v1(56.293,55.685) 56.388,55.685 56.765,56.062 56.765,56.14 56.9,56.275 U4.124@56.9,56.87
  Bottom Layer w0.15: v1(36.005,57.205) 39.585,57.205 39.998,57.618 44.798,57.618 45.941,56.475 55.508,56.475 56.293,55.691 v1(56.293,55.685) ; v1@56.375,55.727 56.375,55.767 57.083,56.475 59.75,56.475 60.191,56.034 60.191,51.884 63.457,48.618 64.658,48.618 64.878,48.398 66.102,48.398 67.779,50.075 71.912,50.075 72,49.987 72,48.525 ; 72.025,48.525 72.025,42.5 72.425,42.1 ; 72.412,42.087 73.22,41.279 73.22,39.849 v1(75.105,37.965)
NetU4_129: U4.129 XP1_1.36 XP1_2.36 XP4_1.24 XP4_2.24 | length 61.4
  Top Layer 1 w0.15: U4.129@54.4,56.87 54.425,56.845 54.425,55.75 v1(54.45,55.725)
  Bottom Layer w0.15: v1(36.005,55.935) 46.767,55.935 47.007,56.175 53.558,56.175 53.925,55.808 54.367,55.808 v1(54.45,55.725) 54.45,53.897 54.538,53.81 55.05,53.81 55.06,53.8 58,53.8 58.191,53.991 58.191,55.11 58.2,55.119 58.2,56.087 58.288,56.175 59.55,56.175 59.775,55.95 59.775,51.875 64.082,47.568 67.318,47.568 68.575,48.825 70.05,48.825 70.175,48.7 71.612,48.7 71.7,48.612 71.7,48.401 71.725,48.376 71.725,42.35 72.642,41.433 72.642,38.724 73.638,37.728 74.072,37.728 75.089,36.711 v1(75.089,36.678)
NetU4_136: U4.136 XP3_1.29 XP3_2.29 | length 37.4
  Top Layer 1 w0.15: v1(50.725,44.675) 51.375,45.325 51.375,48.017 51.025,48.367 v1(51.025,50.55) ; v1(50.847,54.976) 50.851,54.976 51.225,55.35 51.225,55.585 50.9,55.91 U4.136@50.9,56.87
  Bottom Layer w0.15: v1(32.105,32.885) 35.39,36.17 43.562,36.17 47.144,39.751 47.144,40.026 50.725,43.608 v1(50.725,44.675) ; v1@50.85,55 50.85,54.857 50.76,54.767 50.76,52.752 51.025,52.487 v1(51.025,50.55)
NetU4_137: U4.137 XP3_1.27 XP3_2.27 | length 32.3
  Top Layer 1 w0.15: U4.137@50.4,56.87 50.412,56.858 50.412,55.613 v1(50.425,55.6)
  Top Layer w0.15: v1(47.4,48.375) 47.4,52.133 50.075,54.808 50.075,55.208 50.425,55.558 v1(50.425,55.6) v1@50.425,55.625
  Bottom Layer w0.15: v1(32.105,34.155) 38.243,40.293 41.508,40.293 47.4,46.184 v1(47.4,48.375)
NetU4_139: U4.139 XP2_1.15 XP2_2.15 | length 32.6
  Top Layer 1 w0.15: U4.139@49.4,56.87 49.4,58.488 49.325,58.563 49.325,59.054 49.4,59.129 v1(49.4,60.825)
  Bottom Layer w0.15: v1@49.375,60.85 48.964,61.261 48.964,65.326 49.513,65.875 52.243,65.875 52.668,65.45 58.427,65.45 59.777,66.8 60.727,66.8 62.552,68.625 71.195,68.625 v1(71.205,68.635)
NetU4_141: U4.141 XP3_1.6 XP3_2.6 | length 17.1
  Top Layer 1 w0.15: U4.141@48.4,56.87 48.4,55.314 v1(48.48,55.234)
  Bottom Layer w0.15: v1(36.005,48.125) 39.442,51.562 44.662,51.562 47.983,54.883 48.089,54.883 48.44,55.234 v1(48.48,55.234)
NetU4_142: U4.142 XP3_1.8 XP3_2.8 | length 19.3
  Top Layer 1 w0.15: v1(47.856,55.65) 47.878,55.672 47.878,56.848 U4.142@47.9,56.87
  Bottom Layer w0.15: v1(36.005,46.855) 35.48,47.38 35.48,49.612 36.007,50.14 37.02,50.14 40.023,53.143 41.818,53.143 42.118,52.842 44.532,52.842 47.042,55.352 47.148,55.352 47.261,55.465 47.549,55.465 47.734,55.65 v1(47.856,55.65)
VCC: 
pads on no net: CAN1.8 D3.D4 D4.2 D4.3 D4.10 D4.11 D.9 D.CD P.S TYPE-C1. TYPE-C1.A1_B12 TYPE-C1.A8 TYPE-C1.B1_A12 TYPE-C1.B8 TYPE-C1.S1 TYPE-C1.S2 TYPE-C1.S3 TYPE-C1.S4 U2.2 U2.3 U2.10 U2.11 U3.3 U3.5 U3.6 U3.7 U3.14 U3.15 U4.7 U4.12 U4.13 U4.18 U4.19 U4.20 U4.21 U4.44 U4.56 U4.57 U4.59 U4.63 U4.65 U4.68 U4.71 U4.76 U4.77 U4.78 U4.79 U4.80 U4.87 U4.96 U4.97 U4.102 U4.106 U4.118 U4.119 U4.122 U4.128 U4.140 U4.143 XP1_1.1 XP1_1.2 XP1_1.3 XP1_1.4 XP1_1.5 XP1_1.6 XP1_1.11 XP1_1.12 XP1_1.13 XP1_1.14 XP1_1.15 XP1_1.16 XP1_1.18 XP1_1.20 XP1_1.21 XP1_1.22 XP1_1.23 XP1_1.24 XP1_1.26 XP1_1.28 XP1_1.30 XP1_1.32 XP1_1.35 XP1_2.1 XP1_2.2 XP1_2.3 XP1_2.4 XP1_2.5 XP1_2.6 XP1_2.11 XP1_2.12 XP1_2.13 XP1_2.14 XP1_2.15 XP1_2.16 XP1_2.18 XP1_2.20 XP1_2.21 XP1_2.22 XP1_2.23 XP1_2.24 XP1_2.26 XP1_2.28 XP1_2.30 XP1_2.32 XP1_2.35 XP2_1.8 XP2_1.10 XP2_1.12 XP2_1.14 XP2_1.16 XP2_1.18 XP2_1.22 XP2_1.32 XP2_1.33 XP2_1.34 XP2_1.35 XP2_1.36 XP2_2.8 XP2_2.10 XP2_2.12 XP2_2.14 XP2_2.16 XP2_2.18 XP2_2.22 XP2_2.32 XP2_2.33 XP2_2.34 XP2_2.35 XP2_2.36 XP3_1.5 XP3_1.7 XP3_1.13 XP3_1.15 XP3_1.16 XP3_1.17 XP3_1.18 XP3_1.19 XP3_1.20 XP3_1.21 XP3_1.22 XP3_1.31 XP3_1.33 XP3_1.34 XP3_2.5 XP3_2.7 XP3_2.13 XP3_2.15 XP3_2.16 XP3_2.17 XP3_2.18 XP3_2.19 XP3_2.20 XP3_2.21 XP3_2.22 XP3_2.31 XP3_2.33 XP3_2.34 XP4_1.6 XP4_1.8 XP4_1.11 XP4_1.13 XP4_1.18 XP4_1.19 XP4_1.20 XP4_1.21 XP4_1.23 XP4_1.25 XP4_1.26 XP4_1.27 XP4_1.28 XP4_1.29 XP4_1.30 XP4_1.35 XP4_1.36 XP4_1.37 XP4_1.38 XP4_1.39 XP4_1.40 XP4_2.6 XP4_2.8 XP4_2.11 XP4_2.13 XP4_2.18 XP4_2.19 XP4_2.20 XP4_2.21 XP4_2.23 XP4_2.25 XP4_2.26 XP4_2.27 XP4_2.28 XP4_2.29 XP4_2.30 XP4_2.35 XP4_2.36 XP4_2.37 XP4_2.38 XP4_2.39 XP4_2.40
copper on no net:
  other v1: 75.133,26.474 71.283,26.516 71.233,27.766 75.183,27.816 71.258,29.016 75.233,29.066 75.063,32.827 71.138,32.877 36.025,71.125 32.15,71.15 36.09,74.916 32.215,74.941 36.115,76.216 32.14,76.241 32.215,77.491 36.115,77.516

## Polygon pours and split planes (outlines as drawn)
GND on Bottom Layer 1 "NONET_L-01_P-001" (solid, remove dead copper, pour order 28): 31.2,78.2 31.2,25.2 76.1,25.2 76.1,78.2
3V3 on Bottom Layer 1 "NONET_L-01_P-001" (solid, remove dead copper, pour order 6): 51.375,33.25 51.475,33.35 56.8,33.35 56.8,37.25 56.75,37.3 51.4,37.3
3V3_SEN on Bottom Layer 1 "NONET_L-01_P-001" (solid, remove dead copper, pour order 4): 60.75,46.625 60.75,48.125 63.25,48.125 63.25,44.75 58.375,44.75 58.375,46.625
NetTYPE-C1_2 on Bottom Layer 1 "NONET_L-01_P-001" (solid, remove dead copper, pour order 1): 66.412,34.362 66.412,39.262 66.4,39.275 66.425,39.3 70.125,39.3 70.125,34.45 70.125,33.975 70.1,34 66.9,34
5V on Bottom Layer 1 "NONET_L-01_P-001" (solid, remove dead copper, pour order 2): 70.125,39.8 70.125,46.625 68.625,46.625 68.625,48.5 65.475,48.5 65.5,48.475 65.5,39.8
3V3 on Bottom Layer 1 "NONET_L-01_P-001" (solid, remove dead copper, pour order 5): 60.625,65 62.875,65 62.875,61.625 58.75,61.625 58.75,63.5 60.625,63.5
NetTYPE-C1_2 on Bottom Layer 1 "NONET_L-01_P-001" (solid, remove dead copper, pour order 0): 61.6,34.35 61.6,31.025 67.25,31.025 67.25,34.375 66.4,34.375 66.425,34.35 66.425,33.1 62.375,33.1 62.375,34.35
5V on Bottom Layer 1 "NONET_L-01_P-001" (solid, remove dead copper, pour order 3): 66.075,64.85 66.075,61.5 68.75,61.5 68.75,49.725 65.525,49.725 65.525,47.9 66.125,48.5 70.125,48.5 70.125,63.5 68.025,63.5 68.025,64.85
GND on Top Layer 1 "NONET_L-01_P-001" (solid, remove dead copper, pour order 24): 31.2,78.2 31.2,25.2 76.1,25.2 76.1,78.2
3V3 on Top Layer 1 "NONET_L-01_P-001" (solid, remove dead copper, pour order 9): 69.425,31.95 69.45,31.925 69.45,31.225 75.875,31.225 75.9,31.25 75.9,31.95
3V3 on Top Layer 1 "NONET_L-01_P-001" (solid, remove dead copper, pour order 13): 31.325,72.9 31.3,72.875 31.3,71.825 37.7,71.825 37.85,71.975 37.85,72.875
5V on Top Layer 1 "NONET_L-01_P-001" (solid, remove dead copper, pour order 12): 31.325,74.25 31.325,73.05 31.375,73.1 38,73.1 38,74.175 37.9,74.275
5V on Top Layer 1 "NONET_L-01_P-001" (solid, remove dead copper, pour order 8): 69.45,30.95 69.45,29.775 69.5,29.825 75.925,29.825 75.925,30.85
GND on Bottom Layer "NONET_L-01_P-001" (solid, remove dead copper, pour order 27): 31.2,78.2 31.2,25.2 76.1,25.2 76.1,78.2
5V on Bottom Layer "NONET_L-01_P-001" (solid, remove dead copper, pour order 17): 38.075,29.075 38.1,29.05 38.1,27.375 66.3,27.375 68.775,29.85 75.9,29.85 75.9,31.025 75.925,31.05 75.825,31.15 72.925,31.15 72.925,45.825 69.2,45.825 66.25,45.825 66.25,30.975 64.65,29.375 38.1,29.375
GND on Top Layer "NONET_L-01_P-001" (solid, remove dead copper, pour order 26): 31.2,78.2 31.2,25.2 76.1,25.2 76.1,78.2

## Text inside footprints (layer, text, board x,y; h text height)
TYPE-C1: Mechanical 13 "PCB EDGE" at 59.2,26.625 h0.61